# Altium PCB Copy of MB1189.PcbDoc (part 2 of 3)
Units mm, origin at the board's own origin, x right, y up, seen from the top; angles counter-clockwise.
Board outline 60.03 x 127.03 mm, 6 copper layers (TOP, L2_GND, L3_VCC, L4_SIG, L5_GND, BOTTOM), stack 1.58 mm thick; 10 components, 264 nets, 52 pads, 0 vias.
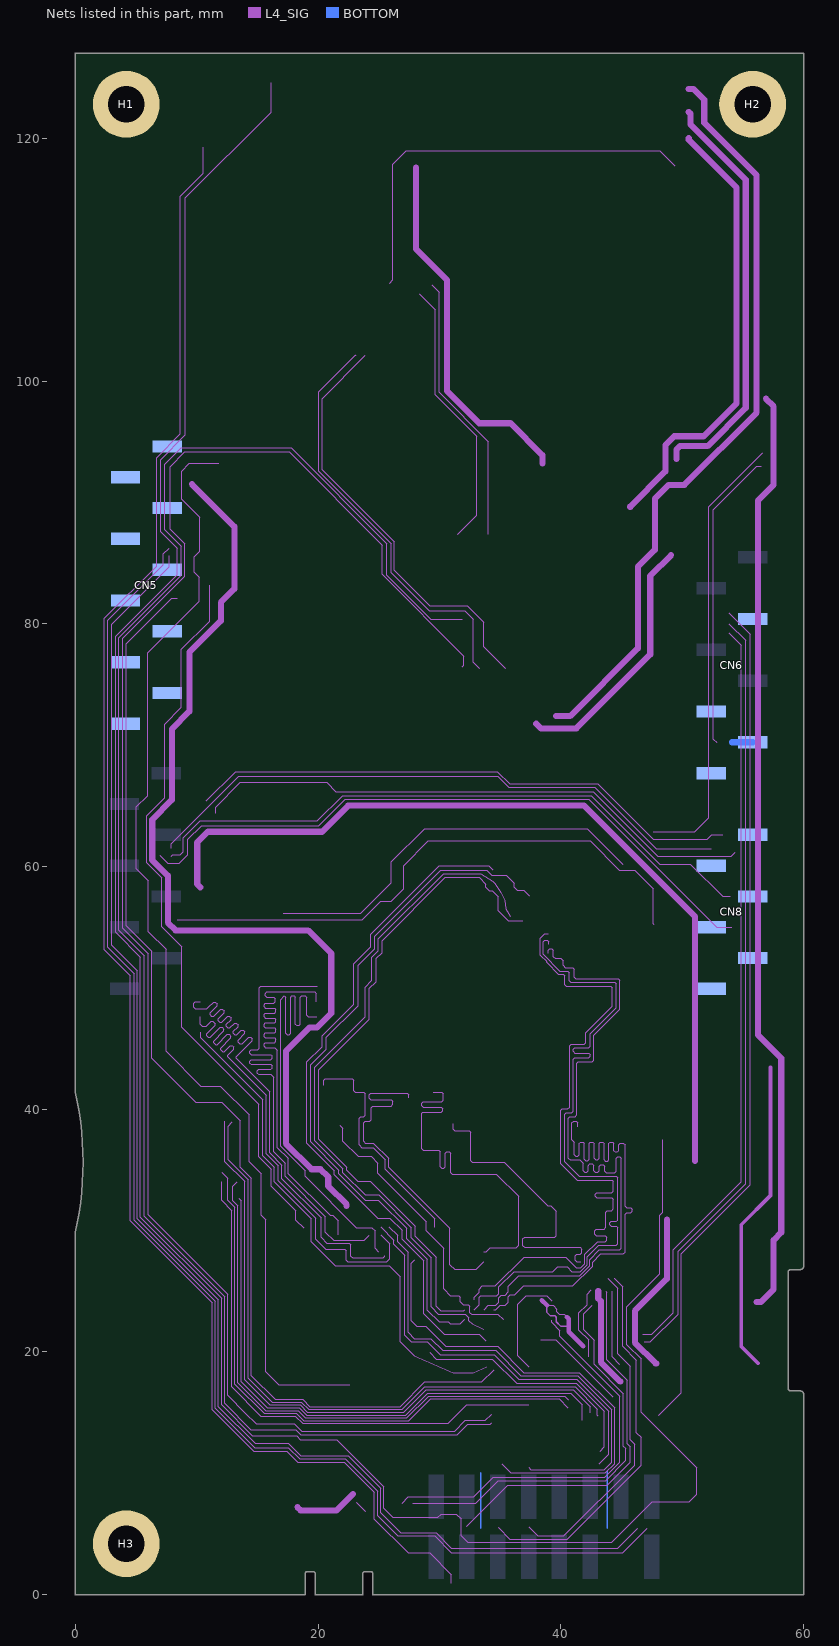
[diagram p6: the nets of this part, all layers, seen from the top]

## Nets (pads, with @x,y where several pads share a name; then routed paths per layer and width w, separated by ;. In a path a pad name is that pad's centre, name@x,y a point inside that pad or via, vN(x,y) a via of type N, cw(c..) or ccw(c..) an arc to the next point about the centre after c; other vN are vias at no path point) (continued)
D28:  | length 41.5
  L4_SIG w0.102: 34.472,23.474 34.65,23.474 35.027,23.851 35.433,23.851 35.662,24.079 35.662,24.536 35.839,24.714 36.22,24.714 36.936,25.429 40.993,25.429 42.621,27.058 42.621,27.381 43.307,28.067 45.161,28.067 45.288,28.194 45.288,31.344 45.415,31.471 45.753,31.471 45.872,31.59 45.872,31.758 45.753,31.877 45.415,31.877 45.288,32.004 45.288,37.059 45.161,37.186 44.907,37.186 44.78,37.059 44.78,36.594 44.661,36.474 44.492,36.474 44.373,36.594 44.373,37.186 44.272,37.287 44.068,37.287 43.967,37.186 43.967,35.832 43.848,35.712 43.68,35.712 43.56,35.832 43.56,37.186 43.459,37.287 43.256,37.287 43.154,37.186 43.154,35.959 43.035,35.839 42.867,35.839 42.748,35.959 42.748,37.186 42.646,37.287 42.443,37.287 42.341,37.186 42.341,35.882 42.222,35.763 42.054,35.763 41.935,35.882 41.935,37.186 41.833,37.287 41.63,37.287 41.528,37.186 41.528,36.238 41.409,36.119 41.241,36.119 41.122,36.238 41.122,37.262 40.919,37.465 40.919,38.862 41.046,38.989 41.275,38.989 41.402,38.862 41.402,38.532
D29:  | length 55.9
  L4_SIG w0.102: 32.872,23.474 33.274,23.876 33.274,24.511 33.401,24.638 34.722,24.638 34.874,24.79 34.874,25.349 36.144,26.619 39.319,26.619 39.726,27.026 40.513,27.026 40.919,26.619 41.608,26.619 42.185,27.197 42.185,27.834 43.129,28.778 44.552,28.778 44.679,28.905 44.679,30.25 44.577,30.352 44.163,30.352 44.044,30.471 44.044,30.639 44.163,30.758 44.577,30.758 44.679,30.86 44.679,34.341 44.552,34.468 41.504,34.468 40.31,35.662 40.31,39.573 40.437,39.7 40.894,39.7 41.021,39.827 41.021,44.094 41.148,44.221 42.299,44.221 42.418,44.341 42.418,44.509 42.299,44.628 41.148,44.628 41.021,44.755 41.021,44.933 41.148,45.06 42.291,45.06 42.418,45.187 42.418,46.228 44.552,48.362 44.552,50.317 44.425,50.444 40.818,50.444 40.691,50.571 40.691,51.257 40.564,51.384 39.929,51.384 38.557,52.756 38.557,53.797 38.684,53.924 38.862,53.924 38.989,53.797 38.989,53.594
D30:  | length 55.8
  L4_SIG w0.102: 32.872,24.274 32.872,24.49 33.274,24.892 33.274,25.179 33.524,25.429 34.599,25.429 36.982,27.813 40.386,27.813 41.275,26.924 41.625,26.924 41.982,27.281 41.982,28.037 43.028,29.083 43.663,29.083 43.79,29.21 43.79,29.439 43.663,29.566 42.926,29.566 42.799,29.693 42.799,29.997 42.926,30.124 43.586,30.124 43.713,30.251 43.713,31.521 43.84,31.648 44.196,31.648 44.323,31.775 44.323,32.563 44.196,32.69 42.977,32.69 42.85,32.817 42.85,32.969 42.977,33.096 44.196,33.096 44.323,33.223 44.323,34.049 44.221,34.151 41.364,34.151 40.005,35.51 40.005,39.903 40.132,40.03 40.589,40.03 40.716,40.157 40.716,45.237 40.843,45.364 41.935,45.364 42.062,45.491 42.062,46.304 44.247,48.489 44.247,50.013 44.12,50.14 40.462,50.14 40.335,50.267 40.335,51.003 40.208,51.13 39.802,51.13 38.824,52.108 38.824,52.184 38.316,52.692 38.316,54.089 38.684,54.458 38.964,54.458
D31:  | length 55.7
  L4_SIG w0.102: 33.672,23.474 34.027,23.83 34.625,23.83 34.9,24.105 34.9,24.46 35.103,24.663 35.408,24.663 35.687,24.943 35.687,25.425 36.551,26.289 41.565,26.289 42.388,27.112 42.388,27.605 43.18,28.397 44.856,28.397 44.983,28.524 44.983,35.967 44.857,36.093 44.678,36.093 44.552,35.967 44.552,34.9 44.425,34.773 43.739,34.773 43.612,34.9 43.612,35.306 43.485,35.433 43.282,35.433 43.155,35.306 43.155,34.925 43.028,34.798 42.824,34.798 42.697,34.925 42.697,35.357 42.57,35.484 42.393,35.484 42.266,35.357 42.266,34.925 42.139,34.798 41.961,34.798 41.834,34.925 41.834,35.535 41.554,35.814 40.767,35.814 40.615,35.966 40.615,39.268 40.742,39.395 41.199,39.395 41.326,39.522 41.326,43.79 41.453,43.917 42.596,43.917 42.723,44.044 42.723,46.101 44.856,48.235 44.856,50.622 44.729,50.749 41.224,50.749 41.097,50.876 41.097,51.537 40.97,51.664 40.361,51.664 40.183,51.841 40.183,52.248 39.98,52.451 39.522,52.451 39.395,52.578 39.395,53.086 39.268,53.213 39.099,53.213 38.972,53.086 38.972,52.849
DSI_VDD12: 
E5V:  | length 62.5
  L4_SIG w0.508: 39.624,72.39 40.767,72.39 46.355,77.978 46.355,84.709 47.752,86.106 47.752,89.637 47.752,90.297 48.895,91.44 50.165,91.44 56.134,97.409 56.134,116.967 51.816,121.285 51.816,123.19 50.927,124.079 50.546,124.079
GND: CN5.7 CN6.6 CN6.7 H1.1 H2.1 H3.1 | length 1.7
  BOTTOM w0.508: 54.102,70.231 CN6.7@55.816,70.231
HSSI_CLK_N: 
HSSI_CLK_P: 
HSSI_D0_N: 
HSSI_D0_P: 
HSSI_D1_N: 
HSSI_D1_P: 
I2C1_SCL: CN5.10 | length 164.3
  L4_SIG w0.102: 31.877,80.391 29.279,80.391 25.669,84.001 25.669,86.599 17.78,94.488 8.7,94.488 7.556,93.345 7.366,93.154 7.366,87.732 8.7,86.398 8.7,83.985 3.556,78.842 3.556,54.737 5.664,52.629 5.664,31.166 12.294,24.536 12.294,15.748 14.453,13.589 16.51,13.589 18.136,13.589 18.567,13.157 31.445,13.157 32.334,14.046 34.188,14.046 34.29,14.148 ; 52.832,70.231 52.578,70.485 52.578,89.408 56.134,92.964 56.515,92.964
I2C1_SDA: CN5.9 | length 177.3
  L4_SIG w0.102: 31.877,76.454 32.004,76.581 32.004,77.343 25.273,84.074 25.273,86.487 17.602,94.158 9.017,94.158 7.798,92.939 7.798,92.075 7.798,87.808 9.017,86.589 9.017,83.922 3.886,78.791 3.886,54.915 5.994,52.807 5.994,31.293 12.548,24.74 12.548,16.408 13.97,14.986 14.884,14.072 18.034,14.072 18.644,13.462 31.242,13.462 32.131,14.351 33.782,14.351 34.29,14.859 ; 47.625,62.865 51.054,62.865 52.197,64.008 52.197,89.662 56.642,94.107
I2C2_SCL:  | length 60.4
  L4_SIG w0.102: 11.049,83.16 11.049,80.213 8.738,77.902 8.738,73.127 7.341,71.73 7.341,65.659 5.867,64.186 5.867,60.3 7.112,59.055 7.112,55.016 8.763,53.365 8.763,46.736 15.113,40.386 15.113,36.068 16.129,35.052 16.129,33.655 18.161,31.623 18.161,30.861 18.796,30.226
I2C2_SDA: 
I2S3_CK: 
K:  | length 26
  L4_SIG w0.305: 56.261,19.05 54.864,20.447 54.864,30.48 57.277,32.893 57.277,43.434
LCD_BL_CTRL:  | length 70
  L4_SIG w0.508: 10.287,58.293 10.033,58.547 10.033,61.976 10.922,62.865 20.32,62.865 22.479,65.024 41.91,65.024 51.054,55.88 51.054,35.75
LCD_INT: 
LCD_RST:  | length 77.1
  L4_SIG w0.508: 56.134,24.117 56.502,24.117 57.531,25.146 57.531,29.21 58.166,29.845 58.166,44.196 56.261,46.101 56.261,47.752 56.261,90.17 57.531,91.44 57.531,97.917 56.896,98.552
LED_STLINK:  | length 34.1
  L4_SIG w0.102: 25.912,108.081 26.162,108.331 26.162,117.881 27.28,118.999 48.133,118.999 49.403,117.729
MCO: 
MIC_CK:  | length 199.4
  L4_SIG w0.102: 16.129,124.587 16.129,122.174 9.068,115.113 9.068,95.58 7.01,93.523 7.01,87.579 8.382,86.208 8.382,84.049 3.302,78.969 3.302,54.585 5.359,52.527 5.359,31.09 12.04,24.409 12.04,15.621 14.58,13.081 18.237,13.081 18.542,12.776 21.514,12.776 25.4,8.89 25.4,7.112 26.162,6.35 29.87,6.35 30.15,6.629 30.937,6.629 31.394,6.629 31.775,6.248 31.775,4.851 32.309,4.318 44.196,4.318 47.522,7.644 50.57,7.644 51.181,8.255 51.181,10.465 46.609,15.037 46.609,19.431 45.441,20.599 45.441,23.724 48.158,26.441 48.158,31.267 48.387,31.496 48.387,37.465
MICROAB_N: 
MICROAB_P: 
NETB1_1: 
NetB2_2: 
NETC4_1: 
NETC15_1: 
NETC18_1: 
NETC18_2: 
NETC19_2: 
NETC20_1: 
NETC20_2: 
NETC21_1: 
NETC21_2: 
NETC22_2: 
NETC24_2: 
NETC27_2: 
NETC33_2:  | length 21
  L4_SIG w0.508: 37.973,71.755 38.354,71.374 41.275,71.374 47.371,77.47 47.371,83.947 49.085,85.661
NETC37_1: 
NETC39_2: 
NETC76_1: 
NETC81_1: 
NETC85_1: 
NETC93_1: 
NETC94_1: 
NETC96_1:  | length 8.8
  L4_SIG w0.102: 38.858,23.83 39.374,23.83 39.675,23.528 39.675,23.294 39.883,23.086 40.287,23.086 40.513,22.86
  L4_SIG w0.127: 38.858,23.83 38.858,23.245 39.116,22.987 39.497,22.987 39.624,22.86 39.624,22.479 40.005,22.098 40.64,22.098
  L4_SIG w0.381: 38.43,24.257 38.858,23.83 ; 40.513,22.86 40.64,22.733 40.64,22.098 40.64,21.666 41.859,20.447
NETCN1_2: 
NETCN1_3: 
NETCN1_4: 
NETCN3_2: 
NETCN3_3: 
NETCN5_8: CN5.8
NETCN8_5: CN8.5
NETCN8_6: CN8.6
NETCN9_10: 
NETCN13_4:  | length 1
  L4_SIG w0.102: 23.139,7.595 23.876,6.858
NETD1_2: 
NETL4_2: 
NETLD1_2: 
NETLD2_2: 
NETLD3_2: 
NETLD4_2: 
NETLD5_1: 
NETLD6_2: 
NETLD6_3: 
NETLD6_4: 
NETLD7_1: 
NETLD8_1: 
NETLD8_2: 
NETLD9_1: 
NETLD9_2: 
NETR1_1:  | length 138.5
  L4_SIG w0.102: 10.541,119.253 10.541,117.145 8.636,115.24 8.636,95.656 6.68,93.701 6.68,84.76 2.362,80.442 2.362,53.137 4.521,50.978 4.521,30.785 11.278,24.028 11.278,15.215 14.681,11.811 17.424,11.811 18.313,10.922 22.156,10.922 24.638,8.44 24.638,6.223 27.432,3.429 29.21,3.429 30.988,1.651 30.988,0.914
NETR9_1: 
NETR12_2: 
NETR22_2: 
NETR26_2: 
NETR27_2: 
NETR28_2: 
NETR29_2: 
NETR37_1: 
NETR42_2: 
NETR43_2: 
NETR46_1: 
NETR49_1: 
NETR59_1: 
NETR117_1: 
NETR122_2: 
NETR143_2: 
NETR144_1: 
NETR154_2: 
NETSB17_1: 
NETSB18_1: 
NRST: CN6.3 | length 114
  L4_SIG w0.102: 27.976,27.61 27.661,27.294 27.661,22.555 28.118,22.098 28.88,22.098 30.531,20.447 34.798,20.447 36.957,18.288 41.529,18.288 44.425,15.392 44.425,10.782 43.676,10.033 35.89,10.033 35.128,10.795 ; 48.063,14.789 49.911,16.637 49.911,28.067 55.626,33.782 55.626,79.121 53.848,80.899
  BOTTOM w0.127: 33.401,5.461 33.401,10.033
OSC_IN: 
OSC_OUT: 
PA0: 
PA1: 
PA2: 
PA4:  | length 47.6
  L4_SIG w0.102: 8.382,55.626 23.622,55.626 25.146,57.15 26.035,57.15 27.051,58.166 27.051,60.071 29.083,62.103 42.418,62.103 44.831,59.69 46.101,59.69 47.625,58.166 47.625,55.27 47.676,55.22
PA5:  | length 40.3
  L4_SIG w0.102: 25.832,30.328 26.568,29.591 26.568,29.058 27.407,28.219 27.407,21.615 27.94,21.082 29.286,21.082 30.251,20.117 34.62,20.117 36.703,18.034 41.402,18.034 44.196,15.24 44.196,10.922 43.561,10.287 37.541,10.287 37.338,10.49
PA6: 
PA7: CN5.2
PA8:  | length 30.6
  L4_SIG w0.102: 32.258,5.639 35.636,9.017 43.815,9.017 45.72,10.922 45.72,12.192 45.491,12.421 45.491,17.653 43.79,19.355 43.79,24.875 43.683,24.982
PA10:  | length 33.5
  L4_SIG w0.102: 27.813,7.544 32.995,7.544 34.849,9.398 43.688,9.398 45.339,11.049 45.339,12.04 45.161,12.217 45.161,16.561 42.748,18.974 42.748,20.955 41.885,21.819 41.885,23.153 42.582,23.851
PA13:  | length 62
  L4_SIG w0.102: 46.736,21.463 47.498,21.463 49.276,23.241 49.276,28.423 54.864,34.011 54.864,78.232 53.848,79.248
PA14:  | length 63.5
  L4_SIG w0.102: 46.863,20.828 47.371,20.828 49.657,23.114 49.657,28.296 55.22,33.858 55.22,78.638 53.848,80.01
PA15: 
PB0: 
PB1: CN8.1 | length 46
  L4_SIG w0.102: 10.795,65.405 13.208,67.818 34.76,67.818 35.776,66.802 43.053,66.802 47.625,62.23 52.07,62.23 52.451,62.611 53.34,62.611
PB2: 
PB3: 
PB4: 
PB5: 
PB6:  | length 42.9
  L4_SIG w0.102: 10.312,46.329 10.312,45.898 15.418,40.792 15.418,36.17 16.383,35.204 16.383,34.006 19.431,30.958 19.431,29.083 21.412,27.102 25.857,27.102 26.772,26.187 26.772,20.853 27.94,19.685 31.115,18.288 32.766,18.288 33.884,18.771
PB7: 
PB10:  | length 34.3
  L4_SIG w0.102: 23.153,102.152 23.109,102.108 23.07,102.108 20.066,99.104 20.066,92.583 26.035,86.614 26.035,84.201 29.146,81.09 32.067,81.09 32.766,80.391 32.766,76.835 33.274,76.327
PB11:  | length 35.3
  L4_SIG w0.102: 23.876,102.108 20.32,98.552 20.32,92.71 26.289,86.741 26.289,84.397 29.181,81.505 32.287,81.505 33.655,80.137 33.655,78.105 35.433,76.327
PB12: 
PB13: 
PB14: CN5.5
PB15: CN5.4
PC0:  | length 19.4
  L4_SIG w0.102: 20.472,41.961 20.472,42.393 20.599,42.52 22.809,42.52 22.936,42.393 22.936,41.529 23.063,41.402 23.749,41.402 23.876,41.275 23.876,39.497 23.749,39.37 23.495,39.37 23.368,39.243 23.368,37.058 23.61,36.817 24.523,36.817 24.611,36.728 24.613,36.728 25.527,35.814 25.527,35.052 29.591,30.988 29.591,30.251
PC1:  | length 38.5
  L4_SIG w0.102: 25.15,30.29 26.238,29.201 26.238,28.854 27.127,27.965 27.127,21.387 27.686,20.828 28.999,20.828 30.066,19.761 34.493,19.761 36.525,17.729 41.326,17.729 43.942,15.113 43.942,11.557 43.18,10.795
  BOTTOM w0.127: 43.815,5.461 43.815,10.16
PC2: CN8.2 | length 49.6
  L4_SIG w0.102: 7.899,61.519 7.899,61.874 13.462,67.437 34.818,67.437 35.707,66.548 42.799,66.548 47.879,61.468 52.387,61.468
PC3: CN8.3 | length 52.3
  L4_SIG w0.102: 7.899,60.833 8.026,60.96 8.636,60.96 8.89,61.214 8.89,62.357 10.287,63.754 19.939,63.754 22.022,65.837 42.494,65.837 48.133,60.198 50.673,60.198 53.34,57.531 53.975,57.531
PC4: CN8.4 | length 54.7
  L4_SIG w0.102: 6.96,60.909 7.62,60.249 8.56,60.249 9.271,60.96 9.271,62.23 10.414,63.373 20.066,63.373 22.225,65.532 42.291,65.532 52.832,54.991 54.102,54.991
PC5:  | length 33
  L4_SIG w0.102: 17.145,56.134 23.495,56.134 26.035,58.674 26.035,60.37 28.784,63.119 42.164,63.119 45.085,60.198
PC6:  | length 31
  L4_SIG w0.102: 34.823,5.563 35.808,4.578 40.519,4.578 46.609,10.668 46.609,12.954 46.228,13.335 46.228,19.304 45.085,20.447 45.085,25.379 44.404,26.06 44.399,26.06
PC7:  | length 27.8
  L4_SIG w0.102: 37.338,5.588 38.1,4.826 40.259,4.826 46.101,10.668 46.101,12.37 45.72,12.751 45.72,18.796 44.676,19.84 44.676,25.239 43.853,26.061
PC8:  | length 60.2
  L4_SIG w0.102: 12.929,38.961 12.573,38.606 12.573,35.839 14.249,34.163 14.249,17.805 16.205,15.85 18.628,15.85 19.216,15.261 26.92,15.261 28.778,17.12 41.173,17.12 43.002,15.291 43.002,14.783 43.053,14.732 ; 44.221,24.982 44.221,19.583 44.831,18.974
PC9:  | length 6.3
  L4_SIG w0.102: 42.291,19.583 42.291,20.98 41.478,21.793 41.478,23.216 42.164,23.901 42.164,24.765 42.52,25.121
PC10:  | length 46.9
  L4_SIG w0.102: 13.462,32.639 13.665,32.436 13.665,17.551 15.824,15.392 18.438,15.392 19.048,14.783 27.21,14.783 29.014,16.586 40.818,16.586 41.783,15.621 41.783,14.351
PC11:  | length 46.2
  L4_SIG w0.102: 13.335,34.036 12.954,33.655 12.954,32.461 13.386,32.029 13.386,17.45 15.672,15.164 18.344,15.164 18.953,14.554 27.305,14.554 29.108,16.358 40.31,16.358 40.615,16.053
PC12:  | length 47.7
  L4_SIG w0.102: 12.065,34.798 12.548,34.315 12.548,32.487 13.132,31.902 13.132,17.348 15.545,14.935 18.198,14.935 18.808,14.326 27.476,14.326 29.279,16.129 39.853,16.129 40.589,15.392
PC13:  | length 19.8
  L4_SIG w0.102: 29.185,19.964 29.743,19.406 34.354,19.406 36.361,17.399 41.275,17.399 43.586,15.088 43.586,12.167 43.231,11.811
PC14: 
PC15: 
PD2:  | length 52.4
  L4_SIG w0.102: 12.04,34.036 12.04,32.487 12.878,31.648 12.878,17.12 15.291,14.707 18.103,14.707 18.713,14.097 30.734,14.097 32.258,15.621 37.363,15.621 ; 37.363,18.758 36.449,19.672 36.449,23.927 37.16,24.638 38.837,24.638 39.243,24.232
PD3: CN5.6 | length 93.9
  L4_SIG w0.102: 8.407,82.118 7.95,82.118 4.191,78.359 4.191,55.118 6.299,53.01 6.299,44.196 9.906,40.589 12.04,40.589 13.564,39.065 13.564,35.23 14.503,34.29 14.503,18.034 16.459,16.078 18.723,16.078 19.307,15.494 26.772,15.494 28.804,17.526 33.477,17.526 34.493,18.542
PD4: 
PD5: 
PD6:  | length 33.4
  L4_SIG w0.102: 26.924,7.544 27.432,8.052 32.842,8.052 34.442,9.652 43.618,9.652 44.856,10.89 44.856,11.659 44.856,16.357 39.929,21.285 39.929,21.742 39.238,22.434 39.238,22.617
PD7: 
PD13: 
PE0:  | length 56.6
  L4_SIG w0.102: 33.833,20.921 33.816,20.921 33.274,21.463 30.378,21.463 28.702,23.139 28.702,27.511 26.924,29.289 26.924,30.023 25.921,31.026 24.905,31.026 21.336,34.595 21.336,34.925 19.075,37.186 19.075,43.891 20.333,45.148 20.333,46.038 22.936,48.641 22.936,51.994 24.333,53.391 24.333,54.407 29.997,60.071 34.061,60.071 34.392,59.741
PE1:  | length 57.3
  L4_SIG w0.102: 33.631,21.869 32.69,22.301 32.427,22.564 32.427,22.821 32.13,23.118 29.917,23.118 29.337,23.698 29.337,27.739 27.686,29.39 27.686,30.229 24.986,32.928 23.891,32.928 22.047,34.773 22.047,35.076 19.736,37.388 19.736,43.459 23.876,47.6 23.876,50.063 24.435,50.622 24.435,52.527 24.968,53.061 24.968,54.026 30.353,59.411 33.401,59.411 34.392,58.776 34.557,58.61 35.049,57.896 35.361,57.22 35.464,56.527 35.839,55.905
PE3: 
PE4: 
PE5: 
PE6: 
PF6:  | length 40.2
  L4_SIG w0.102: 19.875,47.599 19.177,47.599 19.05,47.726 19.05,49.2 18.923,49.327 18.641,49.327 18.539,49.225 18.539,47.015 18.438,46.914 18.234,46.914 18.133,47.015 18.133,49.225 18.031,49.327 17.828,49.327 17.726,49.225 17.726,46.271 17.607,46.152 17.439,46.152 17.32,46.271 17.32,49.225 17.218,49.327 16.916,49.025 16.916,36.932 18.923,34.925 18.923,34.455 23.152,30.226 24.435,30.226 24.689,29.972 24.689,28.522 24.954,28.258
PF7:  | length 41.4
  L4_SIG w0.102: 10.286,48.87 9.881,48.87 9.754,48.743 9.754,48.387 9.881,48.26 10.82,48.26 10.988,48.428 11.383,48.823 11.527,48.823 11.671,48.679 11.671,48.536 11.09,47.955 11.09,47.787 11.209,47.668 11.377,47.668 11.958,48.248 12.102,48.248 12.246,48.104 12.246,47.961 11.754,47.469 11.754,47.301 11.873,47.182 12.041,47.182 12.533,47.673 12.677,47.673 12.821,47.529 12.821,47.386 12.426,46.991 12.426,46.848 12.57,46.703 12.713,46.703 13.108,47.098 13.252,47.098 13.396,46.954 13.396,46.811 13.001,46.416 13.001,46.272 13.145,46.128 13.288,46.128 13.683,46.523 13.827,46.523 13.971,46.379 13.971,46.236 13.431,45.696 13.431,45.523 13.553,45.4 13.726,45.4 14.265,45.939 14.437,45.939 14.558,45.818 14.558,45.647 13.246,44.336 13.246,44.183 16.002,41.427 16.002,36.398 17.018,35.382 17.018,34.265 20.244,31.039 20.244,29.439 20.726,28.956 22.581,28.956 22.708,28.829 22.708,27.864 22.835,27.737 25.352,27.737 25.479,27.864 25.479,27.9
PF8:  | length 38.9
  L4_SIG w0.102: 19.939,50.139 15.265,50.139 15.138,50.012 15.138,45.027 15.011,44.9 14.47,44.9 14.351,44.781 14.351,44.613 14.47,44.494 16.104,44.494 16.205,44.392 16.205,44.189 16.104,44.088 14.47,44.088 14.351,43.968 14.351,43.8 14.47,43.681 16.104,43.681 16.205,43.58 16.205,43.376 16.104,43.275 15.088,43.275 14.986,43.173 14.986,42.97 15.088,42.868 16.104,42.868 16.332,42.64 16.332,36.5 17.272,35.56 17.272,34.468 20.599,31.14 20.599,29.87 21.285,29.185 23.812,29.185 24.232,29.604
PF9:  | length 40.3
  L4_SIG w0.102: 10.288,47.6 10.288,46.989 10.439,46.838 10.795,46.838 11.201,47.244 11.328,47.244 11.532,47.041 11.532,46.901 10.836,46.205 10.836,46.035 10.956,45.914 11.127,45.914 11.948,46.735 12.091,46.735 12.235,46.591 12.235,46.447 11.401,45.613 11.401,45.47 11.545,45.326 11.689,45.326 12.523,46.16 12.666,46.16 12.81,46.016 12.81,45.872 11.976,45.038 11.976,44.895 12.12,44.751 12.264,44.751 12.755,45.242 12.924,45.242 13.043,45.123 13.043,44.955 12.551,44.463 12.551,44.319 15.723,41.148 15.723,36.322 16.713,35.331 16.713,34.112 19.812,31.013 19.812,29.261 20.625,28.448 22.174,28.448 22.301,28.321 22.301,27.559 22.428,27.432 25.654,27.432 25.911,27.689 25.911,28.89 25.146,29.654
PF10:  | length 36.3
  L4_SIG w0.102: 19.851,48.869 19.851,49.53 19.724,49.657 15.748,49.657 15.621,49.53 15.621,49.352 15.748,49.225 16.358,49.225 16.485,49.098 16.485,48.853 16.358,48.726 15.646,48.726 15.545,48.625 15.545,48.422 15.646,48.32 16.408,48.32 16.51,48.218 16.51,48.015 16.408,47.914 15.646,47.914 15.545,47.812 15.545,47.609 15.646,47.507 16.408,47.507 16.51,47.406 16.51,47.202 16.408,47.101 15.646,47.101 15.545,46.999 15.545,46.796 15.646,46.694 16.408,46.694 16.51,46.593 16.51,46.39 16.408,46.288 15.646,46.288 15.545,46.186 15.545,45.983 15.646,45.882 16.408,45.882 16.51,45.78 16.51,45.577 16.408,45.475 15.646,45.475 15.545,45.374 15.545,45.17 15.646,45.069 16.408,45.069 16.637,44.84 16.637,36.83 17.526,35.941 17.526,34.696 20.98,31.242 21.209,31.242 21.641,30.81 21.641,29.642
PF11: 
PG2:  | length 46.8
  L4_SIG w0.102: 11.557,64.389 11.557,64.897 13.589,66.929 20.701,66.929 21.463,66.167 42.672,66.167 48.006,60.833 54.026,60.833 54.381,61.189
PG3: 
PG6: 
PG7: 
PG8:  | length 25.3
  L4_SIG w0.102: 31.115,38.798 31.115,38.354 31.242,38.227 32.461,38.227 32.588,38.1 32.588,35.738 32.715,35.611 35.331,35.611 38.913,32.029 39.188,32.029 39.62,31.598 39.62,29.566 39.493,29.439 37.008,29.439 36.881,29.312 36.881,28.728 37.008,28.601 41.605,28.601 41.732,28.474 41.732,28.169 41.605,28.042 41.326,28.042 41.199,27.915 41.199,27.555 41.326,27.428 41.626,27.428
PG9: 
PG10: CN5.1
PG11: 
PG12: 
PG13: 
PG14: 
PG15:  | length 24.1
  L4_SIG w0.102: 21.768,38.684 22.034,38.417 22.034,37.376 23.292,36.119 24.358,36.119 24.917,35.559 24.917,34.722 28.905,30.735 28.905,29.966 29.307,29.565 29.313,29.565 30.353,28.525 30.353,25.192 30.907,24.638 31.567,24.638 31.716,24.489 31.716,24.126 31.967,23.876 32.385,23.876 32.512,23.749 32.512,23.241 32.639,23.114 34.819,23.114 35.246,22.687
PH0: 
PH1: 
PH2:  | length 30.5
  L4_SIG w0.102: 29.489,41.402 30.201,41.402 30.328,41.275 30.328,40.742 30.201,40.615 28.677,40.615 28.55,40.488 28.55,40.284 28.677,40.157 30.158,40.157 30.277,40.038 30.277,39.87 30.158,39.751 28.626,39.751 28.524,39.649 28.524,36.728 28.651,36.601 29.921,36.601 30.048,36.474 30.048,35.247 30.167,35.128 30.335,35.128 30.455,35.247 30.455,36.373 30.582,36.5 30.785,36.5 30.912,36.373 30.912,34.773 31.039,34.646 34.696,34.646 36.525,32.817 36.525,28.778 36.331,28.584 34.172,28.584 33.858,28.27 33.655,28.27
PH3:  | length 28.1
  L4_SIG w0.102: 27.457,40.945 27.457,41.173 27.33,41.3 24.333,41.3 24.206,41.173 24.206,40.894 24.333,40.767 26.035,40.767 26.162,40.64 26.162,40.386 26.035,40.259 24.511,40.259 24.384,40.132 24.384,39.116 24.257,38.989 23.876,38.989 23.749,38.862 23.749,37.338 23.876,37.211 24.562,37.211 25.832,35.941 25.832,35.204 30.861,30.175 30.861,27.178 31.242,26.797 33.02,26.797 33.63,27.407 33.63,27.435
PH6: CN5.3
PI4:  | length 57.3
  L4_SIG w0.102: 32.072,22.674 31.716,22.318 30.895,22.318 30.734,22.479 29.972,22.479 29.007,23.444 29.007,27.638 27.305,29.34 27.305,30.178 24.971,32.512 23.876,32.512 21.717,34.671 21.717,34.975 19.38,37.312 19.38,43.663 20.663,44.945 20.663,45.91 23.292,48.539 23.292,51.841 24.663,53.213 24.663,54.229 30.124,59.69 33.909,59.69 34.315,59.284 35.509,59.284 36.17,58.623 36.17,58.293 36.424,58.039 36.957,58.039 37.389,57.607
PI5:  | length 55.5
  L4_SIG w0.102: 32.072,23.474 31.991,23.393 30.095,23.393 29.718,23.77 29.718,27.789 27.991,29.516 27.991,30.355 24.284,34.061 23.266,34.061 22.352,34.976 22.352,35.203 20.041,37.514 20.041,43.231 24.219,47.409 24.219,49.949 24.79,50.521 24.79,52.426 25.273,52.908 25.273,53.899 30.48,59.106 33.274,59.106 33.833,58.547 33.833,58.268 34.112,57.988 34.366,57.988 34.849,57.506 34.849,56.337 35.662,55.524 36.855,55.524
PJ2:  | length 7.9
  L4_SIG w0.102: 38.354,20.993 39.586,20.993 44.297,16.282
PK3: 
PWR_ENN: 
SPKR_OUTAN:  | length 119.2
  L4_SIG w0.102: 7.722,86.233 7.239,85.75 7.239,84.861 2.667,80.289 2.667,53.34 4.851,51.156 4.851,30.836 11.532,24.155 11.532,15.342 14.783,12.09 17.551,12.09 18.466,11.176 22.225,11.176 24.892,8.509 24.892,6.477 26.543,4.826 29.591,4.826 30.988,3.429 45.085,3.429 47.117,5.461
SPKR_OUTAP:  | length 117
  L4_SIG w0.102: 7.747,85.598 7.747,84.709 2.997,79.959 2.997,53.518 5.105,51.41 5.105,30.963 11.786,24.282 11.786,15.494 14.808,12.471 17.526,12.471 18.567,11.43 22.479,11.43 25.146,8.763 25.146,6.731 26.797,5.08 29.718,5.08 30.988,3.81 44.704,3.81 46.355,5.461
STL_USB_DM: 
STL_USB_DP: 
STLK_MCO:  | length 93.4
  L4_SIG w0.102: 11.811,93.218 9.398,93.218 8.763,92.583 8.763,90.246 10.236,88.773 10.236,85.979 9.779,85.522 9.779,84.252 10.185,83.845 10.185,81.864 5.944,77.622 5.944,65.837 5.029,64.922 5.029,59.817 6.02,58.826 6.02,54.635 7.468,53.188 7.468,44.755 10.325,41.897 11.951,41.897 14.326,39.522 14.326,35.687 15.316,34.696 15.316,31.267 15.684,30.899 15.684,18.351 16.764,17.272 22.606,17.272
STM_JTCK:  | length 22.5
  L4_SIG w0.102: 29.362,107.925 29.972,107.315 29.972,99.06 34.036,94.996 34.036,87.376
STM_JTMS:  | length 22.4
  L4_SIG w0.102: 28.321,107.188 29.642,105.867 29.642,98.882 33.071,95.453 33.071,88.951 31.496,87.376
STM_RST: 
SWIM_PU_CTRL: 
SWO: 
T_JRST: 
T_JTDI: 
T_JTDO: 
T_NRST: 
T_SWDIO_IN: 
T_SWO: 
U5V_ST_LINK:  | length 34.2
  L4_SIG w0.508: 49.53,93.599 49.53,94.361 49.809,94.64 52.095,94.64 55.245,97.79 55.245,116.586 50.673,121.158 50.673,122.047 50.546,122.174
USB_FS1_N: 
USB_FS1_P: 
USB_RENUMN: 
uSD_D1:  | length 53.4
  L4_SIG w0.102: 12.294,39.014 12.319,38.989 12.319,35.687 13.945,34.061 13.945,17.704 16.027,15.621 18.533,15.621 19.122,15.032 27.072,15.032 28.905,16.866 41.021,16.866 42.418,15.469 42.418,14.986
VBUS_FS1:  | length 64.3
  L4_SIG w0.508: 18.288,7.211 18.565,6.934 21.514,6.934 22.86,8.28 ; 43.078,25.019 43.078,24.409 43.307,24.181 43.307,19.152 44.907,17.551 ; 45.72,89.611 45.72,89.662 48.616,92.558 48.616,94.717 49.352,95.453 51.765,95.453 54.483,98.171 54.483,115.951 50.546,119.888 50.546,120.015 ; 47.879,19.05 47.815,19.05 46.101,20.764 46.101,23.368 48.743,26.01 48.743,30.886
VDD_MCU: 
VDDA: 
VIN: CN6.8
VL: 
VREF+:  | length 80.7
  L4_SIG w0.508: 9.601,91.516 13.106,88.011 13.106,82.88 11.989,81.763 11.989,80.239 9.398,77.648 9.398,72.771 7.95,71.323 7.95,65.481 6.325,63.856 6.325,60.528 7.62,59.233 7.62,55.372 8.255,54.737 19.177,54.737 21.082,52.832 21.082,47.904 19.914,46.736 19.304,46.736 17.348,44.78 17.348,37.16 19.456,35.052 20.193,35.052 20.828,34.417 20.828,33.655 22.339,32.144 22.339,32.017
VUSB_ST_LINK:  | length 30.2
  L4_SIG w0.508: 28.067,117.602 28.067,110.871 30.607,108.331 30.607,99.187 33.274,96.52 35.865,96.52 38.481,93.904 38.481,93.218
pads on no net: CN6.1 Designator2.01 Designator2.02 Designator2.03 Designator2.04 Designator2.05 Designator2.06 Designator2.07 Designator2.08 Designator3.01 Designator3.02 Designator3.03 Designator3.04 Designator3.05 Designator3.06 Designator3.07 Designator3.08 Designator3.09 Designator3.10 Designator3.11 Designator3.12 Designator3.13 Designator3.15 Designator3.16
copper on no net: | length 11.2
  L4_SIG w0.254: 18.669,58.547 18.669,59.944 20.066,59.944 20.066,58.547 18.669,58.547 ; 18.669,60.579 18.669,61.976 20.066,61.976 20.066,60.579 18.669,60.579

## Polygon pours and split planes (outlines as drawn)
GND on L4_SIG "L4_SIG_GND_P038" (solid, remove dead copper, pour order 38): 21.057,26.848 25.73,26.848 26.492,26.086 26.492,20.498 27.076,19.914 27.076,16.739 26.772,16.434 26.721,16.383 23.495,16.383 16.51,16.383 14.757,18.136 14.757,34.315 13.767,35.306 13.767,39.167 11.989,40.945 9.957,40.945 6.629,44.272 6.629,52.984 5.029,54.585 5.029,58.801 4.42,59.411 4.42,65.634 4.991,66.205 4.991,78.359 9.144,82.512 9.22,82.917 9.22,86.843 8.128,87.935 8.128,92.837 9.22,93.929 13.31,93.929 13.513,93.726 13.513,92.507 13.31,92.304 12.243,92.304 10.058,92.304 9.474,91.719 9.474,91.059 11.481,89.052 11.481,81.915 7.061,77.495 7.061,65.761 5.588,64.287 5.588,60.198 6.909,58.877 6.909,54.839 8.331,53.416 8.331,45.263 10.922,42.672 12.573,42.672 14.859,40.386 14.859,35.941 15.875,34.925 15.875,32.029 21.057,26.848
+1V8 on L4_SIG "L4_SIG_+1V8_P037" (solid, remove dead copper, pour order 37): 12.319,91.313 18.542,91.313 19.558,91.313 21.209,89.662 21.209,79.248 21.209,78.867 18.288,75.946 10.541,75.946 10.16,76.327 10.16,77.597 12.7,80.137 17.78,80.137 19.05,81.407 19.05,88.011 18.415,88.646 12.7,88.646 12.192,89.154 12.192,91.186 12.319,91.313
GND on L4_SIG "L4_SIG_GND_P036" (solid, remove dead copper, pour order 36): 23.724,96.672 31.471,96.672 32.131,96.012 32.131,90.297 31.877,90.043 23.495,90.043 23.114,90.424 23.114,96.063 23.724,96.672
GND on L5_GND (split plane): 208 vertices, not listed, extent 0.5,0.5 59.5,126.5
+3V3 on L3_VCC (split plane): 202 vertices, not listed, extent 0.501,0.501 59.499,126.499
VDD_MCU on L3_VCC (split plane): 25.73,54.291 26.403,53.618 26.414,53.593 26.414,43.815 26.423,43.749 26.432,43.725 26.434,43.717 26.438,43.71 26.448,43.687 26.489,43.634 26.997,43.126 27.05,43.085 27.073,43.075 27.08,43.071 27.088,43.069 27.112,43.06 27.178,43.051 46.353,43.051 46.353,39.603 44.523,37.773 44.482,37.72 44.472,37.697 44.468,37.69 44.466,37.682 44.457,37.658 44.448,37.592 44.448,22.204 42.947,20.703 30.988,20.703 30.922,20.694 30.898,20.685 30.89,20.683 30.883,20.679 30.878,20.676 30.86,20.669 30.807,20.628 27.961,17.782 18.796,17.782 18.73,17.773 18.706,17.764 18.698,17.762 18.691,17.758 18.668,17.748 18.615,17.707 14.043,13.135 14.002,13.082 13.992,13.059 13.988,13.052 13.986,13.044 13.977,13.02 13.968,12.954 13.968,8.763 13.968,4.932 13.483,4.447 9.631,4.447 9.273,4.805 9.273,16.785 12.881,20.393 12.922,20.446 12.929,20.464 12.932,20.469 12.936,20.476 12.938,20.484 12.947,20.508 12.956,20.574 12.956,28.85 14.457,30.351 17.653,30.351 17.719,30.36 17.743,30.369 17.751,30.371 17.758,30.375 17.781,30.385 17.834,30.426 18.85,31.442 18.891,31.495 18.901,31.518 18.905,31.525 18.907,31.533 18.909,31.539 18.916,31.557 18.925,31.623 18.925,53.72 18.936,53.745 19.482,54.291 19.531,54.311 25.681,54.311
+5V on L3_VCC (split plane): 223 vertices, not listed, extent 14.48,9.019 55.751,119.632
+3V3_ST_LINK on L3_VCC (split plane): 30.351,116.713 30.36,116.647 30.369,116.623 30.371,116.615 30.375,116.608 30.385,116.585 30.426,116.532 31.315,115.643 31.368,115.602 31.391,115.592 31.398,115.588 31.406,115.586 31.43,115.577 31.496,115.568 33.493,115.568 33.489,115.536 33.489,97.536 33.495,97.484 25.6,89.589 25.559,89.536 25.549,89.513 25.545,89.506 25.543,89.498 25.534,89.474 25.525,89.408 25.525,82.169 25.534,82.103 25.543,82.079 25.545,82.071 25.549,82.064 25.559,82.041 25.6,81.988 26.489,81.099 26.542,81.058 26.565,81.048 26.572,81.044 26.58,81.042 26.604,81.033 26.67,81.024 32.004,81.024 32.07,81.033 32.094,81.042 32.102,81.044 32.109,81.048 32.132,81.058 32.185,81.099 32.693,81.607 32.734,81.66 32.744,81.683 32.748,81.69 32.75,81.698 32.759,81.722 32.768,81.788 32.768,85.492 33.253,85.977 38.756,85.977 41.273,83.46 41.273,62.359 22.204,62.359 18.925,65.638 18.925,101.854 18.916,101.92 18.907,101.944 18.905,101.952 18.901,101.959 18.891,101.982 18.85,102.035 16.893,103.992 16.893,110.511 26.014,119.632 30.351,119.632
GND on L2_GND (split plane): 211 vertices, not listed, extent 0.5,0.5 59.5,126.5

## Keep-outs
Multi-Layer:
  region: 33.492,97.028 52.508,97.028 52.508,116.044 33.492,116.044

## Other copper
TOP:
  text "TOP" at 55.499,-49.276 h1.52
  text "1" at 62.24,-49.31 h1.91
  text ".GTL" at 97.47,-49.4 h1.52
L4_SIG:
  pour cut-out: 24.545,23.851 24.513,24.009 24.423,24.144 24.289,24.234 24.13,24.265 23.971,24.234 23.926,24.204 23.837,24.144 23.747,24.009 23.715,23.851 23.747,23.692 23.837,23.557 23.926,23.497 23.971,23.467 24.13,23.436 24.289,23.467 24.423,23.557 24.513,23.692 24.545,23.851
  pour cut-out: 18.628,78.232 18.592,78.411 18.491,78.562 18.34,78.663 18.161,78.699 17.982,78.663 17.932,78.629 17.831,78.562 17.73,78.411 17.694,78.232 17.73,78.053 17.831,77.902 17.932,77.835 17.982,77.801 18.161,77.765 18.34,77.801 18.491,77.902 18.592,78.053 18.628,78.232
  pour cut-out: 20.025,78.232 19.989,78.411 19.888,78.562 19.737,78.663 19.558,78.699 19.379,78.663 19.329,78.629 19.228,78.562 19.127,78.411 19.091,78.232 19.127,78.053 19.228,77.902 19.329,77.835 19.379,77.801 19.558,77.765 19.737,77.801 19.888,77.902 19.989,78.053 20.025,78.232
  pour cut-out: 17.436,89.388 17.4,89.567 17.299,89.718 17.148,89.819 16.969,89.855 16.79,89.819 16.74,89.785 16.639,89.718 16.538,89.567 16.502,89.388 16.538,89.21 16.639,89.058 16.74,88.991 16.79,88.957 16.969,88.922 17.148,88.957 17.299,89.058 17.4,89.21 17.436,89.388
  pour cut-out: 16.977,78.842 16.941,79.02 16.84,79.172 16.689,79.273 16.51,79.308 16.331,79.273 16.281,79.239 16.18,79.172 16.079,79.02 16.043,78.842 16.079,78.663 16.18,78.512 16.281,78.444 16.331,78.41 16.51,78.375 16.689,78.41 16.84,78.512 16.941,78.663 16.977,78.842
  pour cut-out: 14.945,78.613 14.909,78.792 14.808,78.943 14.657,79.044 14.478,79.08 14.299,79.044 14.249,79.01 14.148,78.943 14.047,78.792 14.011,78.613 14.047,78.434 14.148,78.283 14.249,78.216 14.299,78.182 14.478,78.146 14.657,78.182 14.808,78.283 14.909,78.434 14.945,78.613
  pour cut-out: 13.548,79.121 13.512,79.3 13.411,79.451 13.26,79.552 13.081,79.588 12.902,79.552 12.852,79.518 12.751,79.451 12.65,79.3 12.614,79.121 12.65,78.942 12.751,78.791 12.852,78.724 12.902,78.69 13.081,78.654 13.26,78.69 13.411,78.791 13.512,78.942 13.548,79.121
  text "4" at 19.71,60.833 h1.4
  text "B" at 19.71,58.801 h1.4
  text "L4 SIGNAL" at 55.77,-49.21 h1.52
  text ".G1" at 97.43,-49.36 h1.52
  text "4" at 67.96,-49.41 h1.91
L2_GND (plane layer: these items are gaps in the copper):
  region: 16.637,62.23 25.401,62.23 25.655,61.976 25.655,60.452 25.506,60.303 25.655,60.155 25.655,58.42 25.527,58.292 14.986,58.292 14.986,58.42 16.637,58.42 16.637,60.071 14.986,60.071 14.986,60.452 16.637,60.452 16.637,62.103 14.986,62.103 14.986,62.23
  region: 14.986,62.23 11.261,62.23 11.134,62.103 11.134,60.528 11.405,60.258 11.175,60.028 11.175,58.547 11.43,58.292 14.986,58.292
  pour cut-out: 52.508,116.044 52.508,97.027 33.491,97.027 33.491,116.044 52.508,116.044
  pour cut-out: 34.427,122.151 34.396,122.386 34.305,122.605 34.16,122.793 33.972,122.938 33.753,123.028 33.518,123.059 33.283,123.028 33.064,122.938 32.876,122.793 32.731,122.605 32.641,122.386 32.61,122.151 32.641,121.916 32.731,121.697 32.876,121.509 33.064,121.364 33.283,121.273 33.518,121.242 33.753,121.273 33.972,121.364 34.16,121.509 34.305,121.697 34.396,121.916 34.427,122.151
  pour cut-out: 30.027,122.151 29.996,122.386 29.905,122.605 29.76,122.793 29.572,122.938 29.353,123.028 29.118,123.059 28.883,123.028 28.664,122.938 28.476,122.793 28.331,122.605 28.241,122.386 28.21,122.151 28.241,121.916 28.331,121.697 28.476,121.509 28.664,121.364 28.883,121.273 29.118,121.242 29.353,121.273 29.572,121.364 29.76,121.509 29.905,121.697 29.996,121.916 30.027,122.151
  pour cut-out: 8.629,16.51 8.595,16.771 8.494,17.015 8.334,17.224 8.125,17.384 7.881,17.485 7.62,17.519 7.359,17.485 7.115,17.384 6.906,17.224 6.746,17.015 6.645,16.771 6.611,16.51 6.645,16.249 6.746,16.005 6.906,15.796 7.115,15.636 7.359,15.535 7.62,15.501 7.881,15.535 8.125,15.636 8.334,15.796 8.494,16.005 8.595,16.249 8.629,16.51
  pour cut-out: 8.629,21.59 8.595,21.851 8.494,22.095 8.334,22.304 8.125,22.464 7.881,22.565 7.62,22.599 7.359,22.565 7.115,22.464 6.906,22.304 6.746,22.095 6.645,21.851 6.611,21.59 6.645,21.329 6.746,21.085 6.906,20.876 7.115,20.716 7.359,20.615 7.62,20.581 7.881,20.615 8.125,20.716 8.334,20.876 8.494,21.085 8.595,21.329 8.629,21.59
  pour cut-out: 6.346,102.108 6.298,102.468 6.159,102.804 5.938,103.093 5.649,103.314 5.313,103.453 4.953,103.501 4.593,103.453 4.257,103.314 3.968,103.093 3.747,102.804 3.608,102.468 3.56,102.108 3.608,101.748 3.747,101.412 3.968,101.123 4.257,100.902 4.593,100.763 4.953,100.715 5.313,100.763 5.649,100.902 5.938,101.123 6.159,101.412 6.298,101.748 6.346,102.108
  pour cut-out: 10.015,31.242 9.989,31.434 9.915,31.614 9.797,31.768 9.643,31.886 9.463,31.96 9.271,31.986 9.079,31.96 8.899,31.886 8.745,31.768 8.627,31.614 8.553,31.434 8.527,31.242 8.553,31.05 8.627,30.87 8.745,30.716 8.899,30.598 9.079,30.524 9.271,30.498 9.463,30.524 9.643,30.598 9.797,30.716 9.915,30.87 9.989,31.05 10.015,31.242
  pour cut-out: 10.015,38.792 9.989,38.984 9.915,39.164 9.797,39.318 9.643,39.436 9.463,39.51 9.271,39.536 9.079,39.51 8.899,39.436 8.745,39.318 8.627,39.164 8.553,38.984 8.527,38.792 8.553,38.599 8.627,38.42 8.745,38.266 8.899,38.148 9.079,38.074 9.271,38.048 9.463,38.074 9.643,38.148 9.797,38.266 9.915,38.42 9.989,38.599 10.015,38.792
  pour cut-out: 13.346,102.108 13.298,102.468 13.159,102.804 12.938,103.093 12.649,103.314 12.313,103.453 11.953,103.501 11.593,103.453 11.257,103.314 10.968,103.093 10.747,102.804 10.608,102.468 10.56,102.108 10.608,101.748 10.747,101.412 10.968,101.123 11.257,100.902 11.593,100.763 11.953,100.715 12.313,100.763 12.649,100.902 12.938,101.123 13.159,101.412 13.298,101.748 13.346,102.108
  lines w0.254: 0.371,126.492 0.392,126.544 0.411,126.589 ; 0.371,126.492 0.371,126.492 ; 0.371,126.492 0.371,126.492 ; 0.371,126.492 0.396,41.453 0.402,41.438 0.399,41.423 0.728,39.931 0.955,37.986 1.031,36.824 1.056,35.409 1.006,34.043 0.905,32.654 0.703,31.215 0.374,29.67 0.376,29.656 0.371,29.642 0.371,0.508 0.411,0.411 0.508,0.371 18.669,0.371 18.766,0.411 ; 0.411,126.589 0.462,126.61 0.508,126.629 ; 0.411,126.589 0.411,126.589 ; 0.411,126.589 0.411,126.589 ; 0.508,126.629 59.492,126.629 59.589,126.589 59.629,126.492 59.629,27.305 59.589,27.208 59.492,27.167 58.97,27.167 58.913,27.165 58.859,27.158 58.806,27.146 58.754,27.129 58.703,27.109 58.655,27.083 58.609,27.054 58.566,27.021 58.526,26.984 58.489,26.944 58.456,26.901 58.426,26.855 58.401,26.807 58.38,26.756 58.364,26.704 58.352,26.651 58.345,26.597 58.343,26.54 58.343,17.021 58.345,16.963 58.352,16.909 58.364,16.856 58.38,16.804 58.401,16.754 58.426,16.706 58.456,16.66 58.489,16.616 58.526,16.576 58.566,16.539 58.609,16.506 58.655,16.477 58.703,16.452 58.754,16.431 58.806,16.415 58.859,16.403 58.913,16.396 58.97,16.393 59.492,16.393 59.589,16.353 59.629,16.256 59.629,0.508 59.589,0.411 59.492,0.371 24.74,0.371 ; 0.508,126.629 0.508,126.629 ; 0.508,126.629 0.508,126.629 ; 18.766,0.411 18.766,0.411 ; 18.766,0.411 18.842,0.487 18.883,0.584 ; 18.883,0.584 18.883,0.584 ; 18.883,0.584 18.883,1.975 18.904,1.996 19.806,1.996 19.827,1.975 19.827,0.66 ; 19.827,0.66 19.827,0.66 ; 19.827,0.66 19.855,0.592 19.867,0.563 ; 19.867,0.563 19.867,0.563 ; 19.867,0.563 20.02,0.411 20.117,0.371 ; 20.117,0.371 20.117,0.371 ; 20.117,0.371 23.393,0.371 23.491,0.411 ; 23.491,0.411 23.491,0.411 ; 23.491,0.411 23.541,0.462 23.582,0.559 ; 23.582,0.559 23.582,0.559 ; 23.582,0.559 23.582,1.95 23.603,1.971 24.454,1.971 24.526,1.899 24.526,0.584 24.566,0.487 ; 24.566,0.487 24.566,0.487 ; 24.566,0.487 24.642,0.411 24.74,0.371 ; 24.74,0.371 24.74,0.371
  text "2" at 15.507,60.846 h1.4
  text "B" at 15.469,58.852 h1.4
  text "2" at 65.15,-49.31 h1.91
  text "L2 GND" at 55.77,-49.41 h1.52
  text ".GP1" at 97.59,-49.47 h1.52

## Text inside footprints (layer, text, board x,y; h text height)
CN6: Bottom Overlay "8" at 52.15,66.82 h1.5 r90; Bottom Overlay "7" at 57.2,69.34 h1.5 r90; Bottom Overlay "2" at 51.88,84.09 h1.5 r90; PIN_NUMBER "1" at 55.654,85.471 h0.41 r90; PIN_NUMBER "8" at 52.225,67.691 h0.41 r90; PIN_NUMBER "3" at 55.654,80.391 h0.41 r90; PIN_NUMBER "2" at 52.225,82.931 h0.41 r90; PIN_NUMBER "4" at 52.225,77.851 h0.41 r90; PIN_NUMBER "7" at 55.654,70.231 h0.41 r90; PIN_NUMBER "6" at 52.225,72.771 h0.41 r90; PIN_NUMBER "5" at 55.654,75.311 h0.41 r90; ASSEMBLY_BOTTOM "SSW-108-22-x-S-VS" at 54.635,77.47 h0.76 r90; SFLIB_INFO "Sofer Lib Information" at 43.561,81.534 h0.64 r90; SFLIB_INFO "Ref PN: SSW-108-22-X-S-VS" at 44.831,80.772 h0.64 r90; SFLIB_INFO "Creat : Yuki" at 45.847,80.772 h0.64 r90; SFLIB_INFO "Date  : 2014-12-04" at 46.863,80.772 h0.64 r90; SFLIB_INFO "Rev   : A1" at 47.879,80.772 h0.64 r90; SFLIB_INFO "Remark: D031-014A1" at 48.895,80.772 h0.64 r90; LIB_UNEVALUATED "NO" at 53.899,76.835 h0.89 r90
CN8: Bottom Overlay "6" at 50.94,51.03 h1.5 r90; Bottom Overlay "5" at 58.039,52.705 h1.5 r90; Bottom Overlay "2" at 50.8,60.325 h1.5 r90; PIN_NUMBER "6" at 52.225,49.911 h0.41 r90; PIN_NUMBER "5" at 55.654,52.451 h0.41 r90; PIN_NUMBER "1" at 55.654,62.611 h0.41 r90; PIN_NUMBER "2" at 52.225,60.071 h0.41 r90; PIN_NUMBER "3" at 55.654,57.531 h0.41 r90; PIN_NUMBER "4" at 52.225,54.991 h0.41 r90; SOFER_SYM_NAME "SSW-106-22-X-S-VS" at 54.635,56.896 h0.76 r90; SFLIB_INFO "Sofer Lib Information" at 43.307,61.214 h0.64 r90; SFLIB_INFO "Ref PN: SSW-106-22-X-S-VS" at 44.577,60.452 h0.64 r90; SFLIB_INFO "Creat : Yuki" at 45.593,60.452 h0.64 r90; SFLIB_INFO "Date  : 2014-12-04" at 46.609,60.452 h0.64 r90; SFLIB_INFO "Rev   : A1" at 47.625,60.452 h0.64 r90; SFLIB_INFO "Remark: D031-014A1" at 48.641,60.452 h0.64 r90; LIB_UNEVALUATED "NO" at 53.899,56.896 h0.89 r90
H1: PIN_NUMBER "1" at 4.028,122.809 h0.41; SOFER_SYM_NAME "HOLE_C5R5D3" at 1.219,118.237 h0.76; SFLIB_INFO "Remark: D***" at 0.229,127.432 h0.64; SFLIB_INFO "Rev   : A1" at 0.229,128.448 h0.64; SFLIB_INFO "Date  : 2014-12-08" at 0.229,129.464 h0.64; SFLIB_INFO "Creat : Yuki" at 0.229,130.48 h0.64; SFLIB_INFO "Ref PN: ***" at 0.229,131.496 h0.64; SFLIB_INFO "Sofer Lib Information" at -0.533,132.766 h0.64; LIB_UNEVALUATED "NO" at 3.48,122.809 h0.89
H2: PIN_NUMBER "1" at 55.646,122.809 h0.41; SOFER_SYM_NAME "HOLE_C5R5D3" at 52.837,118.237 h0.76; SFLIB_INFO "Remark: D***" at 51.846,127.432 h0.64; SFLIB_INFO "Rev   : A1" at 51.846,128.448 h0.64; SFLIB_INFO "Date  : 2014-12-08" at 51.846,129.464 h0.64; SFLIB_INFO "Creat : Yuki" at 51.846,130.48 h0.64; SFLIB_INFO "Ref PN: ***" at 51.846,131.496 h0.64; SFLIB_INFO "Sofer Lib Information" at 51.084,132.766 h0.64; LIB_UNEVALUATED "NO" at 55.098,122.809 h0.89
H3: PIN_NUMBER "1" at 4.028,4.191 h0.41; SOFER_SYM_NAME "HOLE_C5R5D3" at 1.219,-0.381 h0.76; SFLIB_INFO "Sofer Lib Information" at -0.533,14.148 h0.64; SFLIB_INFO "Ref PN: ***" at 0.229,12.878 h0.64; SFLIB_INFO "Creat : Yuki" at 0.229,11.862 h0.64; SFLIB_INFO "Date  : 2014-12-08" at 0.229,10.846 h0.64; SFLIB_INFO "Rev   : A1" at 0.229,9.83 h0.64; SFLIB_INFO "Remark: D***" at 0.229,8.814 h0.64; LIB_UNEVALUATED "NO" at 3.48,4.191 h0.89
HW3: ASSEMBLY_BOTTOM "Sticker to mention board CPN code" at 47.12,78.82 h0.75; ASSEMBLY_BOTTOM "Sticker to mention board CPN code" at 47.12,78.82 h0.75
HW4: Bottom Overlay "8x8" at 39.328,43.059 h0.75; Bottom Overlay "QR Code" at 40.217,43.85 h0.75; Bottom Overlay "Sticker" at 39.836,41.789 h0.75; ASSEMBLY_BOTTOM "Sticker" at 39.836,41.781 h0.75; ASSEMBLY_BOTTOM "QR Code" at 40.217,43.813 h0.75; ASSEMBLY_BOTTOM "8x8" at 39.328,43.051 h0.75